# Altium PCB PCB1.PcbDoc
Units mm, origin at the board's own origin, x right, y up, seen from the top; angles counter-clockwise.
Board outline 55.8 x 12.2 mm, 4 copper layers (Top Layer, Signal Layer 1, Signal Layer 2, Bottom Layer), stack 1.58 mm thick; 31 components, 22 nets, 101 pads, 39 vias.
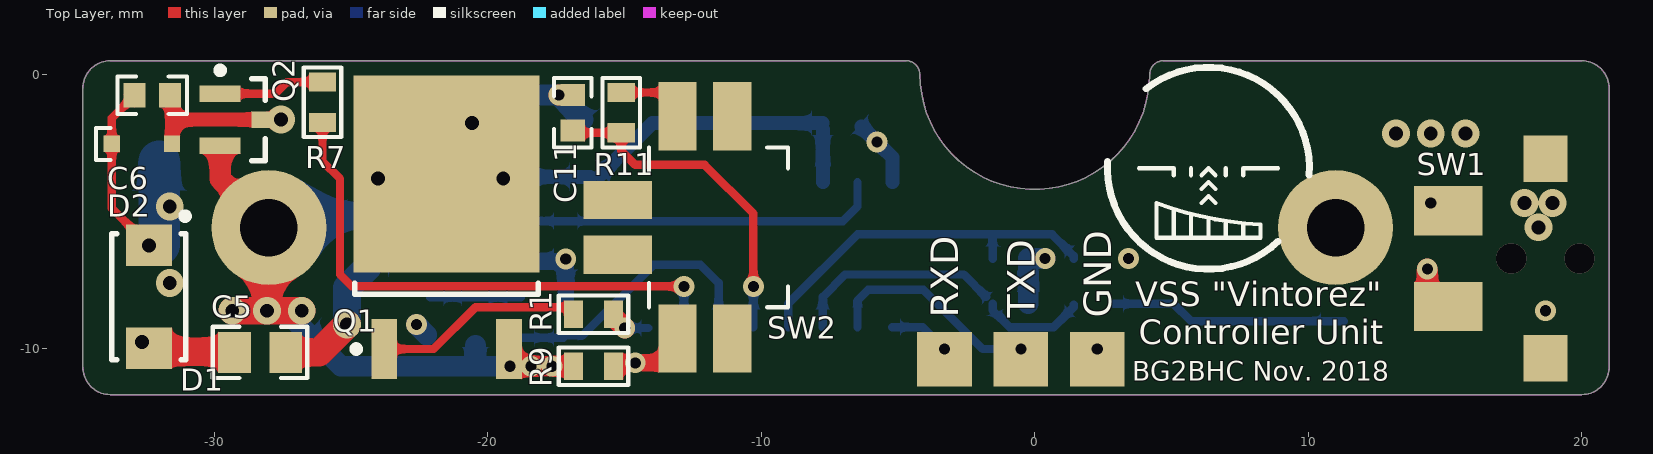
[diagram p0: Top Layer view]
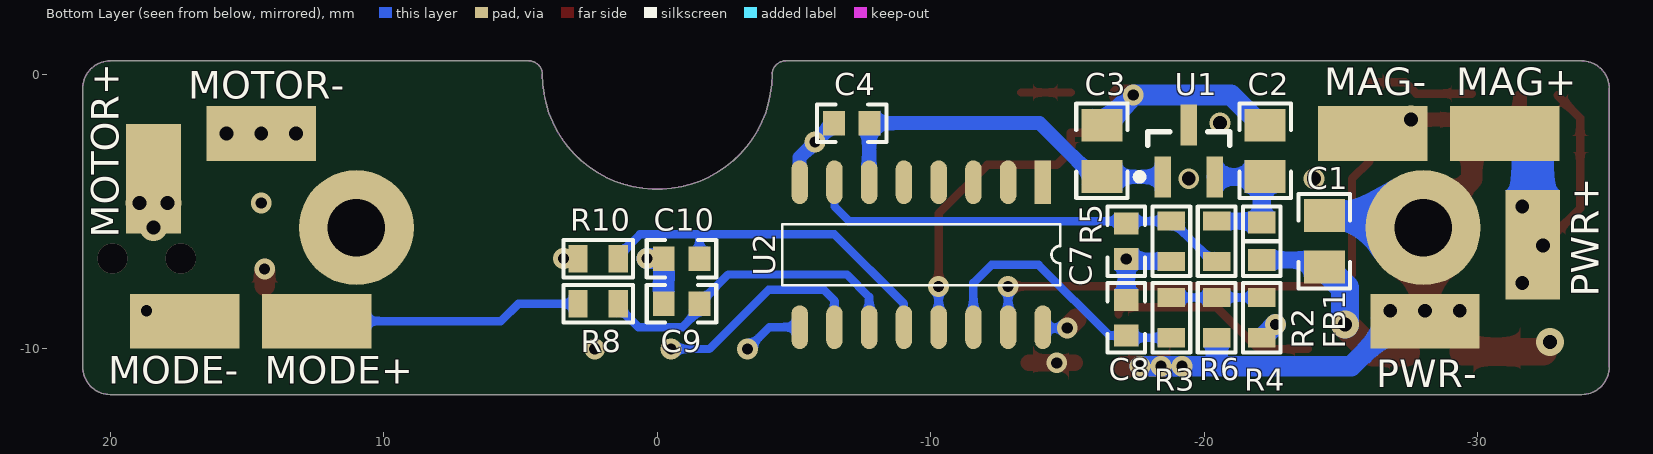
[diagram p1: Bottom Layer view, seen from below]
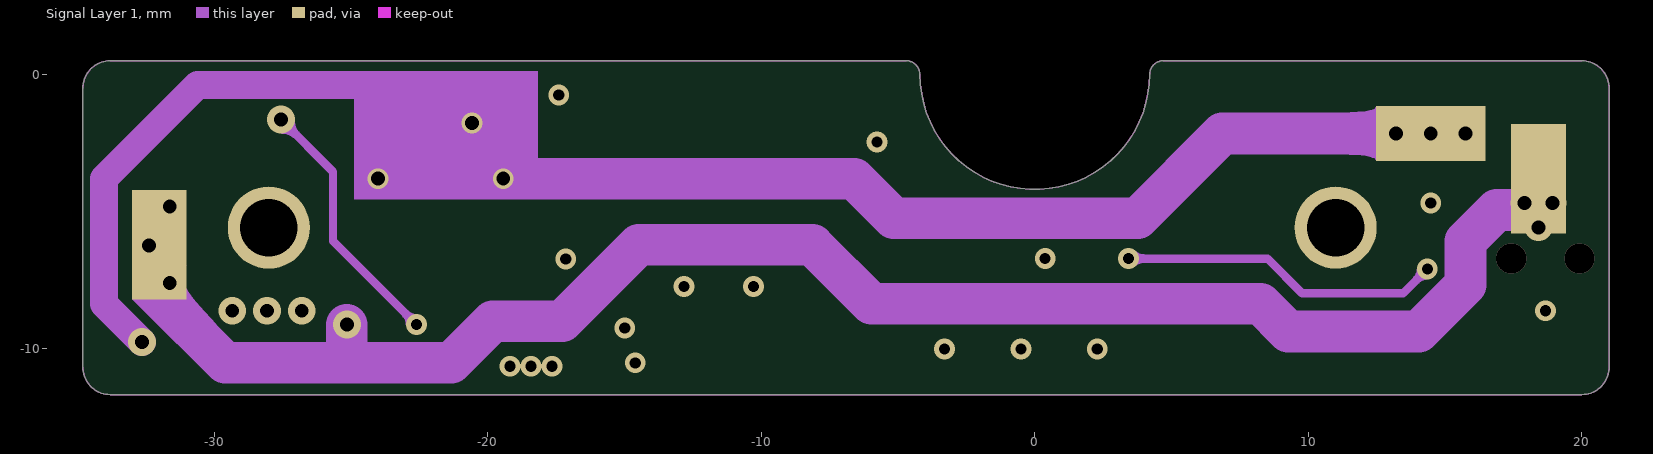
[diagram p2: Signal Layer 1]
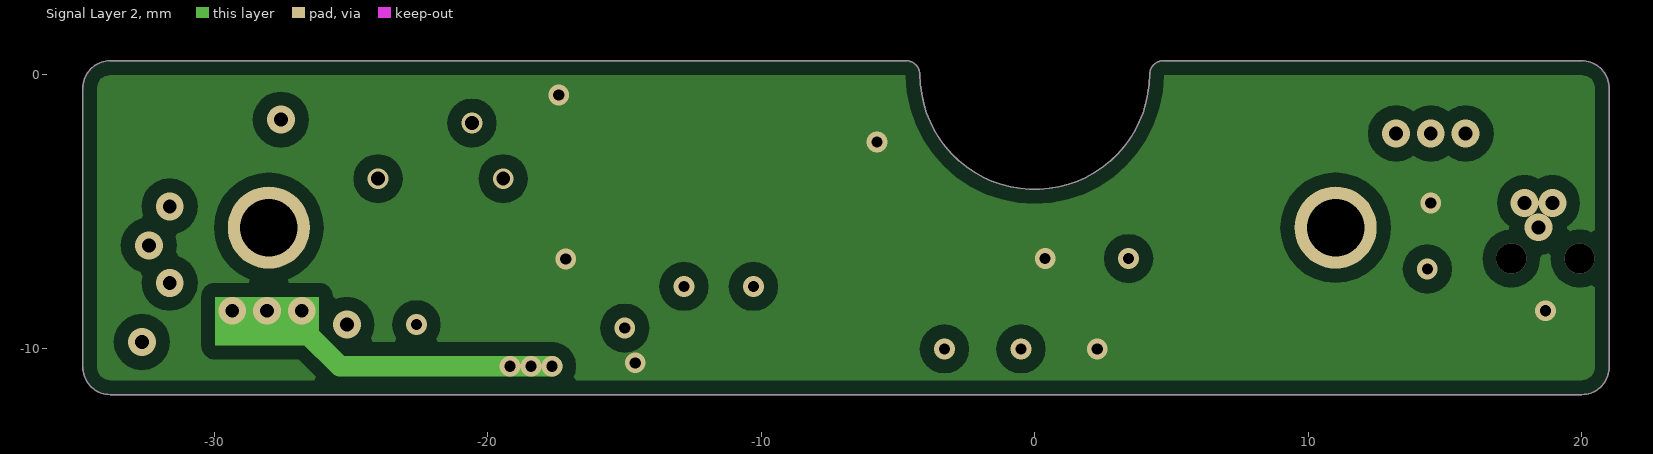
[diagram p3: Signal Layer 2]

## Layer stack, top to bottom
Top Solder: solder mask 0.0102, Solder Resist, Dk 3.5
Top Layer: signal copper 0.0356
Dielectric 1: core 0.2, FR-4, Dk 4.2
Signal Layer 1: signal copper 0.036
Dielectric 3: prepreg 1.0366, Dk 4.2
Signal Layer 2: signal copper 0.036
Dielectric 2: core 0.2, Dk 4.2
Bottom Layer: signal copper 0.0356
Bottom Solder: solder mask 0.0102, Solder Resist, Dk 3.5

## Board outline
21,-0.5 ccw(c20,-0.5) 20,0.5 4.7,0.5 ccw(c4.7,0) 4.2,0 cw(c0,0) -4.2,0 ccw(c-4.7,0) -4.7,0.5 -33.8,0.5 ccw(c-33.8,-0.5) -34.8,-0.5 -34.8,-10.7 ccw(c-33.8,-10.7) -33.8,-11.7 20,-11.7 ccw(c20,-10.7) 21,-10.7

## Design rules (kind name [scope] priority, off if disabled: settings)
Clearance [All] p1: gap=0.254 except(0.508: Arc-Poly Track-Poly SMDPad-Poly THPad-Poly Via-Poly Fill-Poly Poly-Poly)
PolygonConnect [All] p1: connectstyle=Direct reliefconductorwidth=0.254 reliefentries=4 polygonreliefangle="90 Angle" airgapwidth=0.254
RoutingVias [All] p1: holewidth=0.711 width=1.27 viastyle="Through Hole" minholewidth=0.711 minwidth=1.27 maxholewidth=0.711 maxwidth=1.27
SolderMaskExpansion [All] p1: expansion=0.102
Width [All] p1: maxlimit=2.54 minlimit=0.254 preferedwidth=0.254
30 further rules are at their usual default settings.

## Components (designator, comment, footprint, x,y, rotation, side; value= is the part's Value field where it differs from the comment)
C1 "CT41L-0805-2C1-25V-225K" 0805[cap] -24.384,-6.096 r90 bottom
C2 "CT41L-0805-2C1-25V-225K" 0805[cap] -22.225,-2.794 r90 bottom
C3 "CT41L-0805-2C1-25V-225K" 0805[cap] -16.256,-2.794 r90 bottom
C4 "CT41L-0603-2C1-50V-224K" 0603[cap] -7.112,-1.778 r0 bottom
C5 "CT41L-0805-2C1-25V-225K" 0805[cap] -28.321,-10.16 r0 top
C6 "CT41L-0603-2C1-50V-224K" 0603[cap] -32.258,-0.762 r0 top
C7 "CT41L-0603-2C1-50V-224K" 0603[cap] -17.145,-6.096 r270 bottom
C8 "CT41L-0603-2C1-50V-224K" 0603[cap] -17.145,-8.89 r90 bottom
C9 "CT41L-0603-2C1-50V-224K" 0603[cap] -0.889,-8.382 r0 bottom
C10 "CT41L-0603-2C1-50V-224K" 0603[cap] -0.889,-6.731 r0 bottom
C11 "CT41L-0603-2C1-50V-224K" 0603[cap] -16.891,-1.397 r90 top
D1 "S1M-E3/61T" M7 -32.385,-8.128 r270 top
D2 "1N4148WS" SOD323 -32.639,-2.54 r180 top
FB1 "MLCB2B1608-102B" 0603[bead] -22.098,-6.096 r90 bottom
Q1 "NMOS-2" DPAK228P991X239-3N -21.5,-5.588 r90 top
Q2 "MMBT3904" SOT23-3N -28.829,-1.651 r0 top
R1 "RMK1608MB102J" 0603[res] -16.129,-8.763 r180 top
R2 "RMK1608MB102J" 0603[res] -20.447,-6.096 r90 bottom
R3 "RMK1608MB102J" 0603[res] -18.796,-8.89 r90 bottom
R4 "RMK1608MB102J" 0603[res] -22.098,-8.89 r90 bottom
R5 "RMK1608MB102J" 0603[res] -18.796,-6.096 r90 bottom
R6 "RMK1608MB102J" 0603[res] -20.447,-8.89 r90 bottom
R7 "RMK1608MB102J" 0603[res] -26.035,-1.016 r90 top
R8 "RMK1608MB102J" 0603[res] 2.159,-8.382 r180 bottom
R9 "RMK1608MB102J" 0603[res] -16.129,-10.668 r180 top
R10 "RMK1608MB102J" 0603[res] 2.159,-6.731 r180 bottom
R11 "RMK1608MB102J" 0603[res] -15.113,-1.397 r270 top
SW1 "SW-SPST" JJJHRGG200NOPMRTR 18.669,-6.731 r270 top
SW2 "按钮开关-90度-贴片" 按钮开关-90度-贴片 -11.557,-5.588 r270 top
U1 "78L05" SOT23-3N -19.431,-2.794 r90 bottom
U2 "STC15W201S_SOP16_DIP16" SOP16 -14.097,-3.937 r270 bottom

## Footprints (in the part's own frame and the unit in brackets; to place one, negate y for a bottom-side part, rotate by r counter-clockwise, add the part's x,y. Pads: shape width x height; smd on the part's side, far side on the other; paste and mask are expansions set on the pad)
0603[bead] [mm] "Body 1.6x0.8mm"
  rect 0.8x1 smd: 1(-0.685,0) 2(0.685,0)
  silkscreen extent -1.27,-0.69 1.27,0.69, body extent -0.76,-0.38 0.76,0.38, height 0.75
0603[cap] [mm] "Body 1.6x0.8mm"
  rect 0.8x0.9 smd: 1(-0.65,0) 2(0.65,0)
  silkscreen extent -1.27,-0.69 1.27,0.69, body extent -0.76,-0.38 0.76,0.38, height 0.75
0603[res] [mm] "Body 1.6x0.8mm"
  rect 0.7x1 smd: 1(-0.735,0) 2(0.735,0)
  silkscreen extent -1.27,-0.69 1.27,0.69, body extent -0.76,-0.38 0.76,0.38, height 0.75
0805[cap] [mm] "2.0 x 1.3 mm"
  rect 1.2x1.5 smd: 1(-0.939,0) 2(0.939,0)
  silkscreen extent -1.73,-0.94 1.73,0.94, body extent -1.02,-0.64 1.02,0.64, height 0.89
DPAK228P991X239-3N [mm] "D-PAK, 3-Pads, Body 6.21x6.73mm (max), IPC Medium Density"
  rect 2.2x0.95 smd: 1(-4.45,2.28) 3(-4.45,-2.28)
  rect 7.2x6.8 smd: 2(1.95,0)
  silkscreen extent -4.57,-3.35 -2.05,3.43, body extent -2.45,-3.37 3.77,3.37, height 2.39
JJJHRGG200NOPMRTR [mm]
  rect 1.7x1.6 smd: 0(-3.65,0) 0(3.65,0)
  rect 1.8x2.5 smd: 1(-1.75,-3.55) 2(1.75,-3.55)
  body extent -3.05,-2.45 3,4.44, height 2
M7 [mm] "Molded Diode, 2-Leads, Body 4.3x2.5mm, IPC Medium Density"
  rect 1.52x1.68 smd: 1(1.88,0) 2(-1.88,0)
  silkscreen extent -3.07,-1.35 2.3,1.45, body extent -2.3,-1.33 2.3,1.32, height 2.45
SOD323 [mm]
  rect 0.6x0.6 smd: 1(-1.1,0) 2(1.1,0)
  silkscreen extent 1.14,-0.58 1.68,0.58, body extent -0.89,-0.64 0.89,0.64, height 1.1
SOP16 [mm]
  rect 1.6x0.6 smd: 1(0,0)
  oval 1.6x0.6 smd: 2(0,-1.27) 3(0,-2.54) 4(0,-3.81) 5(0,-5.08) 6(0,-6.35) 7(0,-7.62) 8(0,-8.89) 9(5.3,-8.89) 10(5.3,-7.62) 11(5.3,-6.35) 12(5.3,-5.08) 13(5.3,-3.81) 14(5.3,-2.54) 15(5.3,-1.27) 16(5.3,0)
  silkscreen extent 1.53,-9.53 3.77,0.63
SOT23-3N [mm] "SOT23, 3-Leads, Body 2.9x1.3mm, Pitch 0.95mm, Lead Span 2.5mm, IPC Medium Density"
  rect 1.5x0.6 smd: 1(-0.95,0.95) 2(-0.95,-0.95) 3(0.95,0)
  silkscreen extent -1.07,-1.5 0.7,1.92, body extent -0.7,-1.5 0.7,1.5, height 1.1
按钮开关-90度-贴片 [mm]
  rect 2.5x1.4 smd: 1(-4.064,0.5) 2(-4.064,-1.5) 4(4.064,0.5) 5(4.064,-1.5)
  rect 1.4x2.5 smd: 3(-1,-3.683) 6(1,-3.683)
  silkscreen extent -2.92,-2.54 2.92,2.54, body extent -2.92,-2.54 2.92,7.49, height 5.8

## Part data
C1 C2 C3 C4 C5 C6 C7 C8 C9 C10 C11: library part Capacitor, "Chip Capacitor"
D1: library part "Diode 1N4007", "1 Amp General Purpose Rectifier"
D2: library part Diode, "Default Diode"
FB1: library part bead, "Chip Bead"
Q1: "N-Channel Power MOSFET"
Q2: "NPN General Purpose Amplifier"
R1 R2 R3 R4 R5 R6 R7 R8 R9 R10 R11: library part Resistor, "Resistor"
SW1: "Single-Pole, Single-Throw Switch"

## Free pads (board coordinates)
  round 4.2 / inner round 3 / far side round 4.2 hole 2.1: 2(-28,-5.6) 2(11,-5.6)
  rect 2x4 smd far side: 3(-32.004,-6.223) 4(18.415,-3.81)
  rect 2x4 on Mid1: 3(-32.004,-6.223) 4(18.415,-3.81)
  rect 4x2 smd far side: 3(17.272,-9.017) 4(-30.988,-2.159) 4(-28.067,-9.017) 4(-26.162,-2.159) 4(12.446,-9.017) 4(14.478,-2.159)
  rect 4x2 on Mid1: 4(14.478,-2.159)
  rect 2x2 smd: 5(-3.302,-10.414) 6(-0.508,-10.414) 7(2.286,-10.414)

## Via types
v1: diameter 0.762, hole 0.406, Top Layer to Bottom Layer, tented both sides, 19 vias
v2: diameter 1.016, hole 0.508, Top Layer to Bottom Layer, tented both sides, 15 vias
v3: diameter 0.762, hole 0.508, Top Layer to Bottom Layer, tented both sides, 3 vias
v4: diameter 1.1, hole 1.1, Top Layer to Bottom Layer, tented both sides, 2 vias

## Nets (pads, with @x,y where several pads share a name; then routed paths per layer and width w, separated by ;. In a path a pad name is that pad's centre, name@x,y a point inside that pad or via, vN(x,y) a via of type N, cw(c..) or ccw(c..) an arc to the next point about the centre after c; other vN are vias at no path point)
+5: C3.1 C4.1 U1.1 U2.6 | length 12.8
  Bottom Layer w0.508: U1.1@-18.227,-3.744 C3.1@-16.256,-3.744 ; C3.1@-15.875,-3.683 -13.97,-1.778 C4.1 ; U2.6 C4.1@-7.747,-2.017
COUNTER: C10.1 R10.2 U2.12 | length 13.6
  Bottom Layer w0.305: U2.12 -9.017,-8.382 -6.477,-5.842 0.635,-5.842 1.424,-6.631 R10.2 ; C10.1 -1.539,-5.857
GND: C2.2 C3.2 C4.2 C7.2 C8.2 C9.2 C10.2 C11.2 pad.3@17.272,-9.017 pad.7 R5.1 R9.1 SW1.1 SW2.5 U1.3 U2.8 | length 16.4
  Top Layer w0.61: R9.1@-15.267,-10.541 SW2.5@-13.589,-10.541
  Top Layer w0.762: v1(-17.399,-0.747) C11.2
  Bottom Layer w0.508: C4.2@-6.335,-1.905 -5.207,-3.033 U2.8
  Bottom Layer w0.61: R5.1 C7.2@-17.23,-6.831 ; C8.2 v1(-17.145,-6.746)
  Bottom Layer w0.762: C2.2@-22.088,-1.855 -20.98,-0.747 v1@-17.414,-0.747 ; v1@-17.407,-0.754 C3.2@-16.51,-1.651 ; C9.2 C10.2 v1(0.381,-6.731)
  other v1: -14.605,-10.541 2.286,-10.033 18.669,-8.636 14.478,-4.699 -5.771,-2.469
MAG-: C6.2 D2.1 pad.4@-26.162,-2.159 Q2.3 R4.1 | length 15.5
  Top Layer w0.508: D2.1 -31.539,-1.651 ; C6.2@-31.539,-0.831 -31.539,-1.651 ; Q2.3 -31.539,-1.651
  Signal Layer 1 w0.305: v2(-27.559,-1.651) -25.654,-3.556 -25.654,-6.096 v1(-22.606,-9.144)
  Bottom Layer w0.762: v1(-22.606,-9.144) R4.1@-22.225,-9.525
MAG_DET: C8.1 R3.1 U2.14 | length 10.1
  Bottom Layer w0.305: R3.1 C8.1@-17.23,-9.625 ; C8.1 -16.525,-9.54 -13.945,-6.96 -12.217,-6.96 -11.557,-7.62 U2.14
MAG_EN: R7.1 U2.15 | length 20.1
  Top Layer w0.305: R7.1 -26.035,-3.175 -25.4,-3.81 -25.4,-7.313 -24.966,-7.747 v1(-12.827,-7.747)
  Bottom Layer w0.305: U2.15 v1(-12.827,-7.747)
MODE: C9.1 R8.2 U2.11 | length 11.6
  Bottom Layer w0.305: U2.11 -7.747,-8.128 -6.934,-7.315 -2.591,-7.315 C9.1@-1.778,-8.128 ; C9.1 -1.539,-8.621 -0.922,-9.238 0.695,-9.238 1.424,-8.509 R8.2@1.424,-8.409
MODE_SW: pad.4@12.446,-9.017 R8.1 | length 8.7
  Bottom Layer w0.305: R8.1 5.08,-8.382 5.715,-9.017 pad.4@11.303,-9.017
MOTOR-: C5.1 D1.1 pad.4@14.478,-2.159 Q1.2 | length 55.1
  Top Layer w1.016: D1.1@-32.385,-10.135 C5.1@-29.464,-10.135
  Signal Layer 1 w1.016: v2(-32.639,-9.779) -34.025,-8.393 -34.025,-3.799 -30.607,-0.381 -24.003,-0.381
  Signal Layer 1 w1.524: -18.288,-3.81 -6.604,-3.81 -5.16,-5.254 3.763,-5.254 6.858,-2.159 pad.4@13.97,-2.159
  other v2: 13.208,-2.159 14.478,-2.159 15.748,-2.159
  other v3: -24.003,-3.81 -19.431,-3.81 -20.574,-1.778
MOTOR_EN: R1.1 U2.16 | length 1.3
  Top Layer w0.762: R1.1@-15.316,-8.941 v1(-14.986,-9.271)
  Bottom Layer w0.305: v1(-14.986,-9.271) U2.16@-14.131,-9.271
NetC2_1: C2.1 FB1.2 R2.2 U1.2 | length 4.7
  Bottom Layer w0.61: FB1.2 C2.1@-22.098,-3.86 ; FB1.2@-22.048,-5.361 R2.2 ; C2.1@-21.96,-3.744 U1.2
NetC7_1: C7.1 R2.1 R5.2 U2.7 | length 15.7
  Bottom Layer w0.305: R2.1 -20.293,-6.831 R5.2@-18.823,-5.361 ; R5.2 -7.012,-5.361 -6.477,-4.826 U2.7
NetQ1_1: Q1.1 R1.2 | length 7.7
  Top Layer w0.305: Q1.1 -21.976,-10.038 -20.447,-8.509 -17.018,-8.509 -16.864,-8.663 R1.2
NetQ2_1: Q2.1 R7.2 | length 3.9
  Top Layer w0.305: Q2.1 -27.752,-0.701 -27.332,-0.281 R7.2
NetR3_2: R3.2 R4.2 R6.2 | length 3.3
  Bottom Layer w0.305: R4.2 R6.2 R3.2
NetR10_1: R10.1 SW1.2 | length 12.4
  Top Layer w0.762: SW1.2@14.351,-7.713 v1(14.351,-7.112)
  Signal Layer 1 w0.305: v1(3.429,-6.731) 8.509,-6.731 9.779,-8.001 13.462,-8.001 v1(14.351,-7.112)
NetR11_1: R11.1 SW2.2 | length 1.8
  Top Layer w0.305: R11.1 SW2.2@-13.308,-0.662
PGND: C1.2 pad.2@-28,-5.6 pad.4@-28.067,-9.017 Q1.3 Q2.2 R6.1 R9.2 | length 34.3
  Top Layer w0.762: Q2.2@-29.779,-2.794 -29.779,-3.821 pad.2@-28,-5.6 ; Q1.3@-18.923,-10.668 v1(-17.653,-10.668) R9.2@-17.018,-10.668
  Top Layer w1.016: v2(-29.337,-8.636) v2(-28.067,-8.636) ; pad.2@-28.067,-5.667 v2(-28.067,-8.636) ; v2(-26.797,-8.636) v2(-28.067,-8.636)
  Signal Layer 2 w0.762: -26.543,-9.525 -25.4,-10.668 v1(-17.653,-10.668)
  Bottom Layer w0.762: pad.4@-27.097,-8.936 -25.365,-10.668 v1(-17.653,-10.668) ; -20.447,-10.541 R6.1@-20.447,-9.906
  Bottom Layer w1.016: pad.2@-27.557,-5.157 C1.2
  other v1: -19.177,-10.668 -18.415,-10.668
RXD: pad.5 U2.9 | length 2.2
  Bottom Layer w0.305: U2.9 -4.098,-9.237 v1(-3.302,-10.033)
TRIGGER: C11.1 R11.2 U2.13 | length 12.3
  Top Layer w0.305: C11.1@-16.806,-2.132 R11.2 -15.113,-2.794 -14.605,-3.302 -12.065,-3.302 -10.287,-5.08 v1(-10.287,-7.747)
  Bottom Layer w0.305: U2.13 v1(-10.287,-7.747)
TXD: pad.6 U2.10 | length 8
  Bottom Layer w0.305: U2.10 -6.477,-8.255 -6.096,-7.874 -4.064,-7.874 -1.905,-10.033 v1(-0.508,-10.033)
VCC: C1.1 C5.2 C6.1 D1.2 D2.2 FB1.1 pad.3@-32.004,-6.223 pad.4@18.415,-3.81 pad.4@-30.988,-2.159 | length 75.4
  Top Layer w0.305: C6.1 -33.739,-1.593 D2.2 -33.739,-4.894 v2(-32.385,-6.248)
  Top Layer w1.016: C5.2 -26.162,-10.16 v2(-25.146,-9.144)
  Signal Layer 1 w1.524: pad.3@-32.131,-6.858 -32.131,-8.001 -29.591,-10.541 -21.336,-10.541 -19.812,-9.017 -17.272,-9.017 -14.478,-6.223 -8.128,-6.223 -5.969,-8.382 8.255,-8.382 9.271,-9.398 14.041,-9.398 15.748,-7.691 15.748,-6.096 16.891,-4.953 pad.4@17.907,-4.953 ; -25.146,-10.16 v2(-25.146,-9.144)
  Bottom Layer w0.61: C1.1@-23.876,-6.781 FB1.1
  Bottom Layer w1.016: v2(-25.146,-9.144) -25.146,-7.797 C1.1
  Bottom Layer w1.524: pad.3@-32.004,-6.223 -32.004,-3.175
  other v2: -31.623,-7.62 18.415,-5.588 -31.623,-4.826 17.907,-4.699 18.923,-4.699
pads on no net: SW1.0 SW2.1 SW2.3 SW2.4 SW2.6 U2.1 U2.2 U2.3 U2.4 U2.5
copper on no net:
  other v4: 17.419,-6.731 19.919,-6.731

## Polygon pours and split planes (outlines as drawn)
GND on Signal Layer 2 "GND_L03_P000" (solid, remove dead copper, pour order 0): -34.925,-12.065 -34.925,0.635 21.59,0.635 21.59,-12.065

## Keep-outs
Keep-Out Layer:
  the board outline again, w0.025

## Other copper
Signal Layer 1:
  rectangle net MOTOR-: -24.892,-4.572 -18.161,0.127
Signal Layer 2:
  rectangle net PGND: -29.972,-9.906 -26.162,-8.128

## Silkscreen, mask and mechanical layers (free items; w line width, h text height)
Top Overlay:
  lines w0.152: 3.81,-3.429 5.08,-3.429 5.08,-3.683 ; 5.08,-5.969 5.08,-4.953 ; 5.715,-5.969 5.715,-5.131 ; 5.715,-3.683 5.715,-3.429 ; 6.096,-4.699 6.35,-4.445 6.604,-4.699 ; 6.096,-4.191 6.35,-3.937 6.604,-4.191 ; 6.096,-3.683 6.35,-3.429 6.604,-3.683 ; 6.35,-5.969 6.35,-5.258 ; 6.985,-5.969 6.985,-5.461 ; 6.985,-3.683 6.985,-3.429 ; 7.62,-5.969 7.62,-5.461 ; 7.62,-3.683 7.62,-3.429 8.89,-3.429 ; 8.254,-5.968 8.254,-5.484 cw(c8.89,7.239) 4.445,-4.699 4.445,-5.969 8.255,-5.969
  lines w0.254: 2.667,-3.175 ccw(c6.35,-3.429) 8.896,-6.102 ; 4.075,-0.522 cw(c6.35,-3.429) 10.033,-3.683
  text "VSS \"Vintorez\"" at 3.683,-8.763 h1.52
  text "RXD" at -2.794,-8.89 h1.02 r90
  text "TXD" at 0,-8.89 h1.02 r90
  text "GND" at 2.794,-8.89 h1.02 r90
  text "Controller Unit" at 3.81,-10.16 h1.52
  text "BG2BHC Nov. 2018" at 3.556,-11.43 h1.22
Bottom Overlay:
  text "MAG+" at -29.21,-0.762 h1.02
  text "MAG-" at -24.384,-0.762 h1.02
  text "MOTOR-" at 17.145,-0.889 h1.02
  text "MOTOR+" at 19.685,-5.969 h1.02 r270
  text "PWR+" at -34.417,-8.128 h1.02 r270
  text "MODE+" at 14.351,-11.303 h1.02
  text "MODE-" at 20.066,-11.303 h1.02
  text "PWR-" at -26.289,-11.43 h1.02
Mechanical 1:
  lines w0.152: -33.5,-10.4 19.7,-10.4 19.7,-0.8 -33.5,-0.8 -33.5,-10.4
  lines w0.254: -5.5,0 ccw(c0,0) 5.5,0